# Altium PCB spine.PcbDoc
Units mil, origin at the board's own origin, x right, y up, seen from the top; angles counter-clockwise.
Board outline 2204.72 x 3346.82 mil, 2 copper layers (Top, Bottom); 70 components, 74 nets, 404 pads, 89 vias.
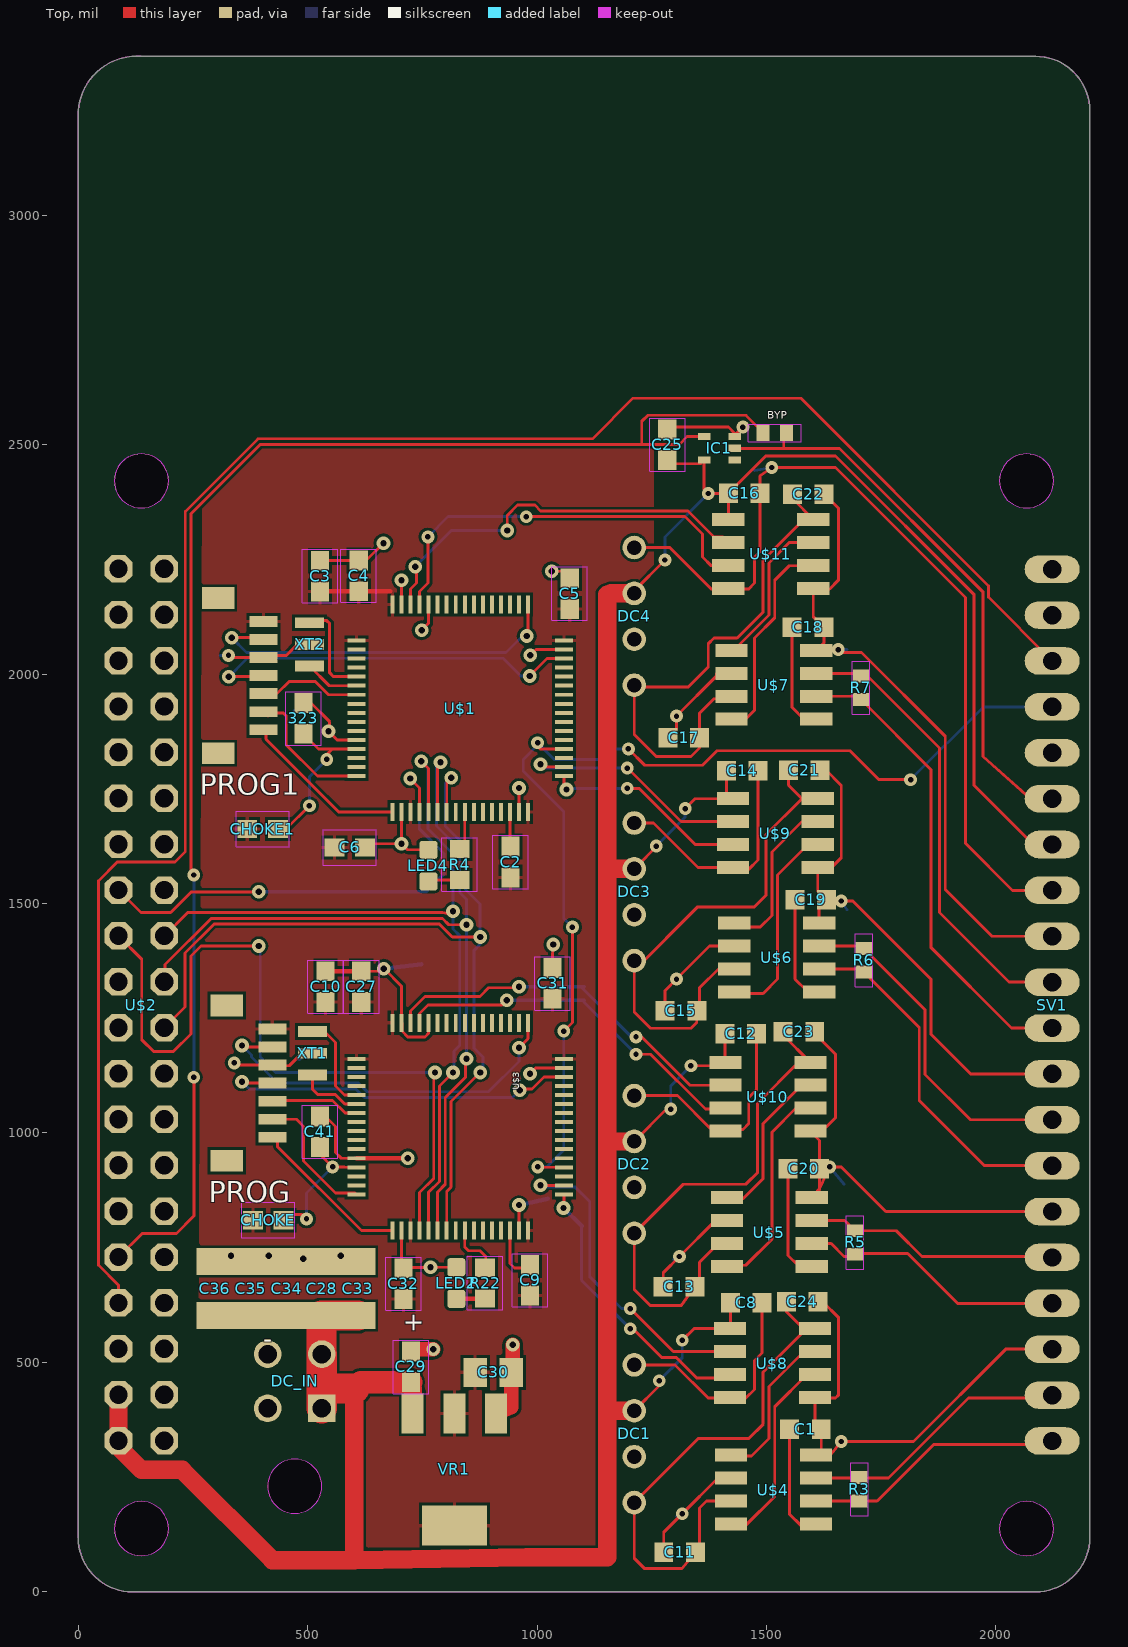
[diagram p0: Top view]
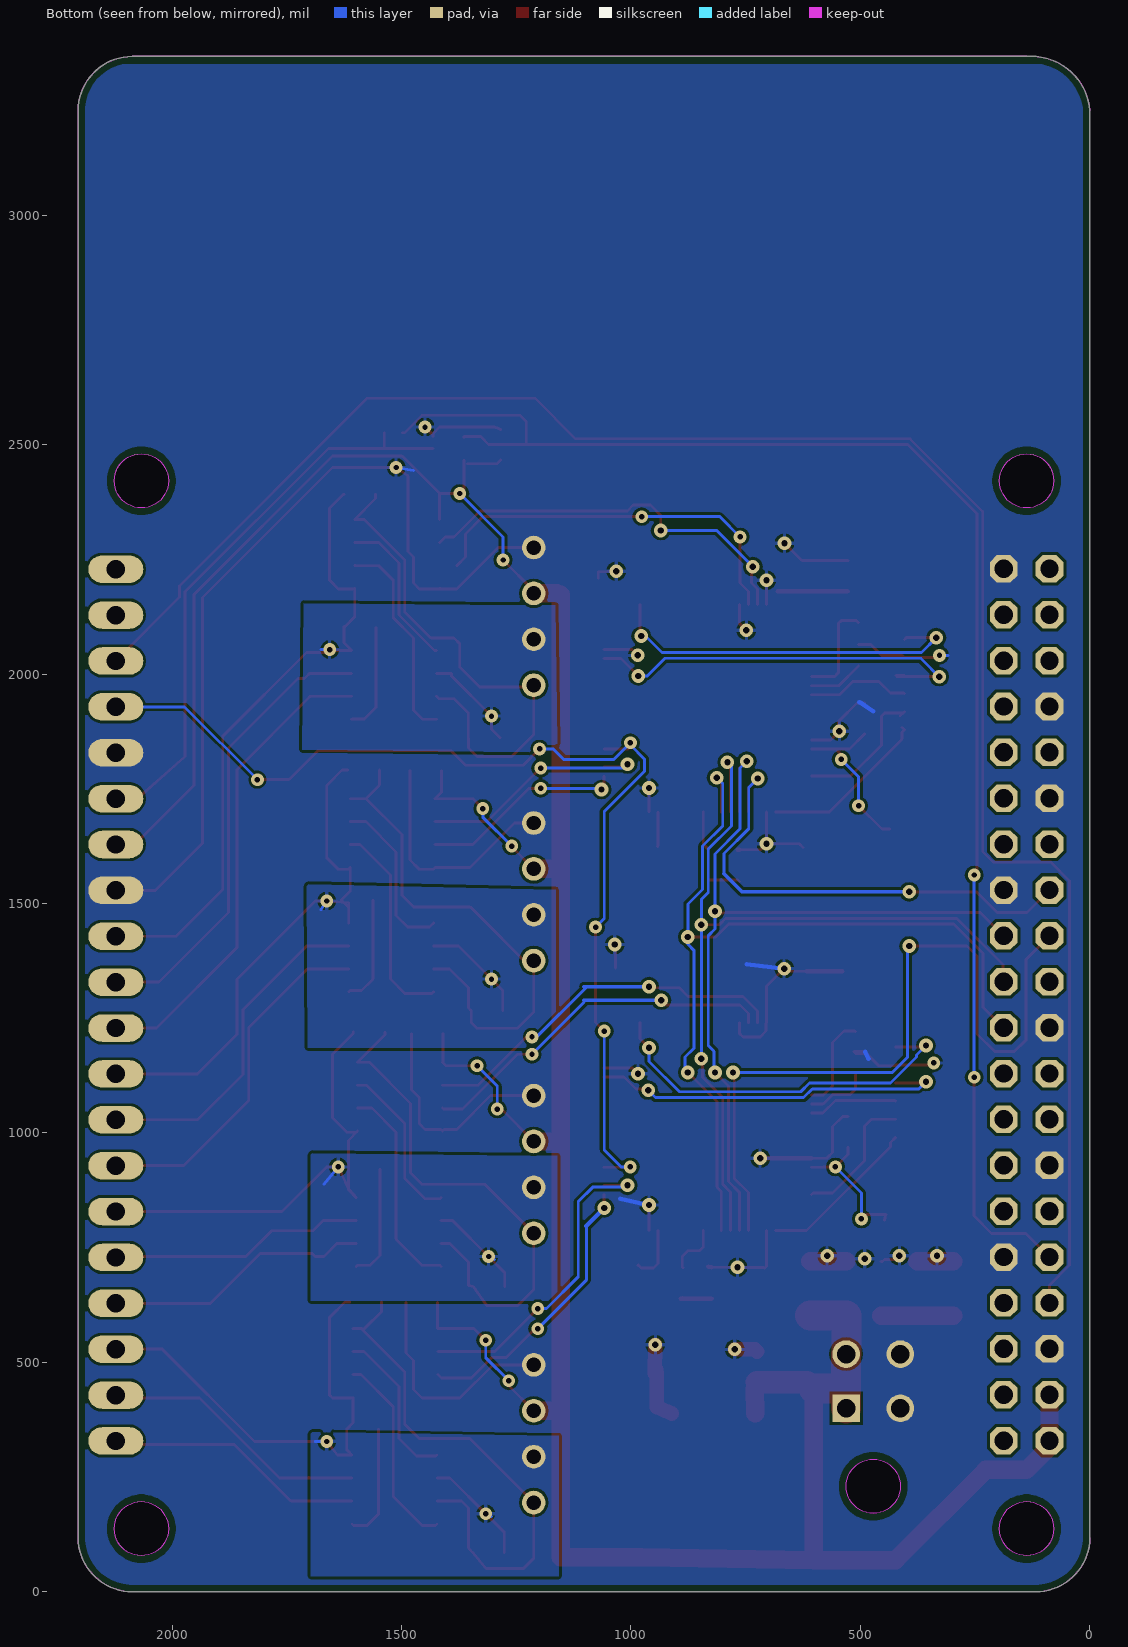
[diagram p1: Bottom view, seen from below]

## Layer stack, top to bottom
Top Solder: solder mask 0.4, Solder Resist, Dk 3.5
Top: signal copper 1.378
Dielectric 1: dielectric 12.6, FR-4, Dk 4.8
Bottom: signal copper 1.378
Bottom Solder: solder mask 0.4, Solder Resist, Dk 3.5

## Board outline
2204.72,3228.35 2204.72,118.11 cw(c2086.61,118.11) 2086.61,0 118.11,0 cw(c118.11,118.11) 0,118.11 0,3228.35 cw(c127.95,3218.51) 137.79,3346.46 2086.61,3346.46 cw(c2086.61,3228.35)
cut-out: 2066.92,2362.2 ccw(c2066.92,2421.26) 2125.97,2421.26 ccw(c2066.92,2421.26) 2066.92,2480.32 ccw(c2066.92,2421.26) 2007.87,2421.26 ccw(c2066.92,2421.26)
cut-out: 2066.92,78.75 ccw(c2066.92,137.8) 2125.97,137.8 ccw(c2066.92,137.8) 2066.92,196.85 ccw(c2066.92,137.8) 2007.87,137.8 ccw(c2066.92,137.8)
cut-out: 137.79,2362.2 ccw(c137.79,2421.26) 196.84,2421.26 ccw(c137.79,2421.26) 137.79,2480.32 ccw(c137.79,2421.26) 78.73,2421.26 ccw(c137.79,2421.26)
cut-out: 472.05,170.87 ccw(c472.05,229.92) 531.11,229.92 ccw(c472.05,229.92) 472.05,288.98 ccw(c472.05,229.92) 413,229.92 ccw(c472.05,229.92)
cut-out: 137.79,78.75 ccw(c137.79,137.8) 196.84,137.8 ccw(c137.79,137.8) 137.79,196.85 ccw(c137.79,137.8) 78.73,137.8 ccw(c137.79,137.8)

## Design rules (kind name [scope] priority, off if disabled: settings)
BoardOutlineClearance [All] p1: gap=15 ignorepadtopadclearanceinfootprint=FALSE
Clearance [All] p1: gap=6 ignorepadtopadclearanceinfootprint=FALSE except(0: Arc-Hole Track-Hole SMDPad-Hole THPad-Hole Via-Hole Fill-Hole Poly-Hole Region-Hole Text-Hole)
ComponentClearance [All] p1: gap=1 collisioncheckmode=3 verticalgap=1 showdistances=FALSE
DiffPairsRouting [All] p1: maxlimit=393.7 minlimit=6 mostfreqgap=8 toplayer_minwidth=6 toplayer_maxwidth=15 toplayer_prefwidth=8 bottomlayer_minwidth=6 bottomlayer_maxwidth=15 bottomlayer_prefwidth=8 maxuncoupledlength=500
HoleSize [All] p1: absolutevalues=TRUE maxlimit=265 minlimit=10 maxpercent=80.000 minpercent=20.000
HoleToHoleClearance [All] p1: gap=10 allowstackedmicrovias=FALSE
MinimumAnnularRing [All] p1: minimumring=5
MinimumSolderMaskSliver [All] p1: minsoldermaskwidth=0
PlaneClearance [All] p1: clearance=10
PlaneConnect [All] p1: planeconnectstyle=Direct reliefexpansion=16 reliefentries=4 reliefconductorwidth=6 reliefairgap=6
PolygonConnect [All] p1: connectstyle=Relief reliefconductorwidth=8 reliefentries=4 polygonreliefangle="90 Angle" airgapwidth=6
RoutingCorners [All] p1: cornerstyle=45-Degree minsetback=49.21 maxsetback=49.21
RoutingVias [All] p1: holewidth=15 width=30 viastyle="Through Hole" minholewidth=13 minwidth=27 maxholewidth=100 maxwidth=114
SilkToSilkClearance [All] p1: silktosilkclearance=0
SilkToSolderMaskClearance [IsPad] p1: minsilkscreentomaskgap=6 clearancetoexposedcopper=TRUE
SolderMaskExpansion [All] p1: expansion=2.95 istentingtop=FALSE
Width [All] p1: maxlimit=400 minlimit=6 preferedwidth=8
20 further rules are at their usual default settings.

## Classes and differential pairs
polygon class PolygonThermal_ON_Width98400_Gap100000: Polygon_1_Net_3V3
polygon class PolygonThermal_ON_Width100000_Gap100000: Polygon_1_Net_CAN1_GND Polygon_1_Net_CAN2_GND Polygon_1_Net_CAN3_GND
polygon class PolygonThermal_ON_Width160000_Gap100000: Polygon_1_Net_CAN4_GND Polygon_1_Net_GND
polygon class Isolate_9.84: Polygon_1_Net_3V3
polygon class Isolate_10: Polygon_1_Net_CAN1_GND Polygon_1_Net_CAN2_GND Polygon_1_Net_CAN3_GND Polygon_1_Net_CAN4_GND Polygon_1_Net_GND

## Components (designator, comment, footprint, x,y, rotation, side; value= is the part's Value field where it differs from the comment)
323 "1 uF" C0603 490.55,1903.54 r90 top (schematic designator C7)
BYP "" R0402 1518.11,2525.98 r180 top
C1 ".1 uF" C0603K 1585.04,354.33 r0 top
C2 "4.7" C0603 942.52,1590.55 r90 top
C3 "1uF" C0603 527.17,2213.78 r90 top
C4 "100nF" C0603 611.42,2214.17 r90 top
C5 "100nF" C0603 1071.26,2175.59 r90 top
C6 "100nF" C0603 591.73,1622.44 r0 top
C8 ".1 uF" C0603K 1455.91,630.32 r0 top
C9 "4.7" C0603 985.04,679.13 r90 top
C10 "1uF" C0603 538.98,1318.9 r90 top
C11 "1 uF" C0603K 1310.63,85.83 r180 top
C12 ".1 uF" C0603K 1444.09,1216.14 r0 top
C13 "1 uF" C0603K 1309.45,665.35 r180 top
C14 ".1 uF" C0603K 1447.24,1789.37 r0 top
C15 "1 uF" C0603K 1313.78,1266.54 r180 top
C16 ".1 uF" C0603K 1451.57,2394.09 r0 top
C17 "1 uF" C0603K 1320.08,1861.42 r180 top
C18 ".1 uF" C0603K 1590.55,2101.97 r0 top
C19 ".1 uF" C0603K 1596.85,1507.87 r0 top
C20 ".1 uF" C0603K 1581.5,921.65 r0 top
C21 ".1 uF" C0603K 1582.28,1790.94 r0 top
C22 ".1 uF" C0603K 1590.94,2392.13 r0 top
C23 ".1 uF" C0603K 1570.87,1220.47 r0 top
C24 ".1 uF" C0603K 1578.35,631.89 r0 top
C25 "100nF" C0603 1283.86,2500 r90 top
C27 "100nF" C0603 616.93,1318.9 r90 top
C28 "47 uF" C1206K 530.32,661.02 r90 top
C29 "100nF" C0603 725.2,490.16 r90 top
C30 "10uF" C0805K 904.33,478.35 r0 top
C31 "100nF" C0603 1033.86,1325.98 r90 top
C32 "100nF" C0603 708.66,671.65 r90 top
C33 "47 uF" C1206K 609.06,661.02 r90 top
C34 "47 uF" C1206K 454.72,661.02 r90 top
C35 "47 uF" C1206K 375.98,661.02 r90 top
C36 "47 uF" C1206K 297.24,661.02 r90 top
C41 "1 uF" C0603 526.77,1002.76 r90 top
CHOKE "600r" 0603 414.17,809.84 r0 top
CHOKE1 "600r" 0603 401.97,1662.2 r0 top
DC1 "VA-1224S" 4SIL 1211.81,344.49 r270 top
DC2 "VA-1224S" 4SIL 1211.81,931.5 r270 top
DC3 "VA-1224S" 4SIL 1211.81,1525.59 r270 top
DC4 "VA-1224S" 4SIL 1211.81,2125.98 r270 top
DC_IN "" 43045-0400 472.05,229.92 r0 top
IC1 "74AHC1G14DCK" SC70-5 1397.64,2492.13 r90 top
LED2 "G" LED-0603 824.02,672.83 r0 top
LED4 "G" LED-0603 763.39,1582.68 r0 top
PROG "22" BM07B-SRSS-TB 359.06,1108.66 r90 top
PROG1 "BM07B-SRSS-TB" BM07B-SRSS-TB 340.16,1996.85 r90 top
R3 "" R0402 1702.36,223.62 r90 top
R4 "70" R0603 831.5,1585.04 r90 top
R5 "" R0402 1693.31,761.42 r90 top
R6 "" R0402 1712.2,1376.38 r90 top
R7 "" R0402 1705.91,1970.47 r90 top
R22 "70" R0603 886.61,672.83 r90 top
SV1 "" MA20-1L 2122.83,1278.74 r90 top
U$1 "STM32F446RET6" TQFP64 832.68,1925.59 r270 top
U$2 "" UP_BOARD 2204.72,0 r90 top
U$3 "STM32F446RET6" TQFP64 832.68,1013.78 r270 top
U$4 "MCP2561" SO08 1515.35,222.83 r270 top
U$5 "MCP2561" SO08 1506.3,783.86 r270 top
U$6 "MCP2561" SO08 1522.44,1382.68 r270 top
U$7 "MCP2561" SO08 1516.14,1976.77 r270 top
U$8 "SI8410" SO08 1512.99,498.43 r270 top
U$9 "SI8410" SO08 1519.29,1653.54 r270 top
U$10 "SI8410" SO08 1503.15,1079.13 r270 top
U$11 "SI8410" SO08 1509.45,2262.2 r270 top
VR1 "LM1117" SOT-223 820.08,266.54 r180 top
XT1 "CSTCE" CSTCE 510.63,1173.62 r270 top
XT2 "CSTCE" CSTCE 504.33,2064.96 r270 top

## Footprints (in the part's own frame and the unit in brackets; to place one, negate y for a bottom-side part, rotate by r counter-clockwise, add the part's x,y. Pads: shape width x height; smd on the part's side, far side on the other; paste and mask are expansions set on the pad)
4SIL [mil] "4SIL"
  round 51.5 hole 31.5: 1(-150,0) 2(-50,0) 3(50,0) 4(150,0)
  body extent -176,-26 176,26, height 50
0603 [mm] "0603"
  rect 1.1x1 smd: 1(-0.85,0) 2(0.85,0)
  Top keep-out lines w0.051: -1.473,-0.983 -1.473,0.983 1.473,0.983 1.473,-0.983 -1.473,-0.983
  body extent -1.5,-1.01 1.5,1.01, height 3.81
43045-0400 [mil] "43045-0400"
  rect 60.24x60.24 / inner round 55.65 / far side rect 60.24x60.24 hole 40.16: P$1(59.06,170.08)
  round 60.24 hole 40.16: P$2(-59.06,170.08) P$3(59.06,288.19) P$4(-59.06,288.19)
  body extent -89,140 89,319, height 50
BM07B-SRSS-TB [mm] "BM07B-SRSS-TB"
  rect 0.6x1.55 smd: 1(3,-1.625) 2(2,-1.625) 3(1,-1.625) 4(0,-1.625) 5(-1,-1.625) 6(-2,-1.625) 7(-3,-1.625)
  rect 1.2x1.8 smd: FIT@1(4.3,0.9) FIT@2(-4.3,0.9)
  body extent -4.9,-2.4 4.9,1.8, height 3.81
C0603 [mm] "C0603"
  rect 1.1x1 smd: 1(-0.85,0) 2(0.85,0)
  Top keep-out lines w0.051: -1.473,0.983 -1.473,-0.983 1.473,-0.983 1.473,0.983 -1.473,0.983
  body extent -1.5,-1.01 1.5,1.01, height 3.81
C0603K [mm] "C0603K"
  rect 1.05x1.08 smd: 1(-0.875,0) 2(0.875,0)
  body extent -1.4,-0.54 1.4,0.54, height 3.81
C0805K [mm] "C0805K"
  rect 1.3x1.6 smd: 1(-1,0) 2(1,0)
  body extent -1.65,-0.8 1.65,0.8, height 3.81
C1206K [mm] "C1206K"
  rect 1.5x2 smd: 1(-1.5,0) 2(1.5,0)
  body extent -2.25,-1 2.25,1, height 3.81
CSTCE [mil] "CSTCE"
  rect 23.62x62.99 smd: 1(-47.24,0) 2(0,0) 3(47.24,0)
  body extent -59,-31 59,31, height 50
LED-0603 [mm] "LED-0603"
  rrect30% 1x1 smd: A(0,-0.877) C(0,0.877)
  body extent -0.51,-1.39 0.51,1.39, height 1.27
MA20-1L [mil] "MA20-1L"
  oval 60x120 hole 40: 1(950,0) 2(850,0) 3(750,0) 4(650,0) 5(550,0) 6(450,0) 7(350,0) 8(250,0) 9(150,0) 10(50,0) 11(-50,0) 12(-150,0) 13(-250,0) 14(-350,0) 15(-450,0) 16(-550,0) 17(-650,0) 18(-750,0) 19(-850,0) 20(-950,0)
  body extent -980,-60 980,60, height 150
R0402 [mm] "R0402"
  rect 0.7x0.9 smd: 1(-0.65,0) 2(0.65,0)
  Top keep-out lines w0.051: 1.473,0.483 1.473,-0.483 -1.473,-0.483 -1.473,0.483 1.473,0.483
  body extent -1.5,-0.51 1.5,0.51, height 3.81
R0603 [mm] "R0603"
  rect 1x1.1 smd: 1(-0.85,0) 2(0.85,0)
  Top keep-out lines w0.051: -1.473,0.983 -1.473,-0.983 1.473,-0.983 1.473,0.983 -1.473,0.983
  body extent -1.5,-1.01 1.5,1.01, height 3.81
SC70-5 [mm] "SC70-5"
  rect 0.4x0.7 smd: 1(-0.65,-0.85) 2(0,-0.85) 3(0.65,-0.85) 4(0.65,0.85) 5(-0.65,0.85)
  body extent -1.07,-1.2 1.07,1.2, height 3.81
SO08 [mm] "SO08"
  rect 0.72x1.78 smd: 1(-1.905,-2.35) 2(-0.635,-2.35) 3(0.635,-2.35) 4(1.905,-2.35) 5(1.905,2.35) 6(0.635,2.35) 7(-0.635,2.35) 8(-1.905,2.35)
  body extent -2.51,-3.24 2.51,3.24, height 3.81
SOT-223 [mil] "SOT-223"
  rect 47.99x87.99 smd: 1(-90.98,-122.01) 2(0,-122.01) 3(90.98,-122.01)
  rect 141.73x86.61 smd: 4(0,122.01)
  body extent -115,-166 115,165, height 150
TQFP64 [mm] "TQFP64"
  rect 0.22x1 smd: 1(-3.75,-5.75) 2(-3.25,-5.75) 3(-2.75,-5.75) 4(-2.25,-5.75) 5(-1.75,-5.75) 6(-1.25,-5.75) 7(-0.75,-5.75) 8(-0.25,-5.75) 9(0.25,-5.75) 10(0.75,-5.75) 11(1.25,-5.75) 12(1.75,-5.75) 13(2.25,-5.75) 14(2.75,-5.75) 15(3.25,-5.75) 16(3.75,-5.75) 33(3.75,5.75) 34(3.25,5.75) 35(2.75,5.75) 36(2.25,5.75) 37(1.75,5.75) 38(1.25,5.75) 39(0.75,5.75) 40(0.25,5.75) 41(-0.25,5.75) 42(-0.75,5.75) 43(-1.25,5.75) 44(-1.75,5.75) 45(-2.25,5.75) 46(-2.75,5.75) 47(-3.25,5.75) 48(-3.75,5.75)
  rect 1x0.22 smd: 17(5.75,-3.75) 18(5.75,-3.25) 19(5.75,-2.75) 20(5.75,-2.25) 21(5.75,-1.75) 22(5.75,-1.25) 23(5.75,-0.75) 24(5.75,-0.25) 25(5.75,0.25) 26(5.75,0.75) 27(5.75,1.25) 28(5.75,1.75) 29(5.75,2.25) 30(5.75,2.75) 31(5.75,3.25) 32(5.75,3.75) 49(-5.75,3.75) 50(-5.75,3.25) 51(-5.75,2.75) 52(-5.75,2.25) 53(-5.75,1.75) 54(-5.75,1.25) 55(-5.75,0.75) 56(-5.75,0.25) 57(-5.75,-0.25) 58(-5.75,-0.75) 59(-5.75,-1.25) 60(-5.75,-1.75) 61(-5.75,-2.25) 62(-5.75,-2.75) 63(-5.75,-3.25) 64(-5.75,-3.75)
  body extent -6.25,-6.25 6.25,6.25, height 3.81
UP_BOARD [mil] "UP_BOARD"
  oct 60x60 / inner round 55.43 / far side oct 60x60 hole 40: 1(329.53,2016.93) 2(329.53,2116.93) 3(429.53,2016.93) 4(429.53,2116.93) 5(529.53,2016.93) 6(529.53,2116.93) 7(629.53,2016.93) 8(629.53,2116.93) 9(729.53,2016.93) 10(729.53,2116.93) 11(829.53,2016.93) 12(829.53,2116.93) 13(929.53,2016.93) 14(929.53,2116.93) 15(1029.53,2016.93) 16(1029.53,2116.93) 17(1129.53,2016.93) 18(1129.53,2116.93) 19(1229.53,2016.93) 20(1229.53,2116.93) 21(1329.53,2016.93) 22(1329.53,2116.93) 23(1429.53,2016.93) 24(1429.53,2116.93) 25(1529.53,2016.93) 26(1529.53,2116.93) 27(1629.53,2016.93) 28(1629.53,2116.93) 29(1729.53,2016.93) 30(1729.53,2116.93) 31(1829.53,2016.93) 32(1829.53,2116.93) 33(1929.53,2016.93) 34(1929.53,2116.93) 35(2029.53,2016.93) 36(2029.53,2116.93) 37(2129.53,2016.93) 38(2129.53,2116.93) 39(2229.53,2016.93) 40(2229.53,2116.93)
  body extent 302,1989 2257,2145, height 150

## Part data
323 C2 C3 C4 C5 C6 C9 C10 C25 C27 C29 C31 C32 C41: library part C0603, PackageName=C0603
BYP R3 R5 R6 R7: library part R0402, PackageName=R0402
C1 C8 C11 C12 C13 C14 C15 C16 C17 C18 C19 C20 C21 C22 C23 C24: library part C0603K, PackageName=C0603K
C28 C33 C34 C35 C36: library part C1206K, PackageName=C1206K
C30: library part C0805K, PackageName=C0805K
CHOKE CHOKE1: library part 0603, PackageName=0603
DC1 DC2 DC3 DC4: library part 4SIL, PackageName=4SIL
DC_IN: library part 43045-0400, PackageName=43045-0400
IC1: library part SC70-5, PackageName=SC70-5
LED2 LED4: library part LED-0603, PackageName=LED-0603
PROG: library part BM07B-SRSS-TB, PackageName=BM07B-SRSS-TB
R4 R22: library part R0603, PackageName=R0603
SV1: library part MA20-1L, PackageName=MA20-1L
U$1 U$3: library part TQFP64, PackageName=TQFP64
U$2: library part UP_BOARD, PackageName=UP_BOARD
U$4 U$5 U$6 U$7 U$8 U$9 U$10 U$11: library part SO08, PackageName=SO08
VR1: library part SOT-223, PackageName=SOT-223
PROG1: PackageName=BM07B-SRSS-TB
XT1 XT2: PackageName=CSTCE

## Free pads (board coordinates)
  round 118.11 hole 118.11 unplated: MH1(137.79,137.8) MH1(472.05,229.92) MH2(137.79,2421.26) MH3(2066.92,2421.26) MH4(2066.92,137.8)

## Via types
v1: diameter 29.78/29.78 (per signal layer), hole 13.78, Top to Bottom, tented both sides, 49 vias
v2: diameter 27.81/27.81 (per signal layer), hole 11.81, Top to Bottom, tented both sides, 40 vias

## Nets (pads, with @x,y where several pads share a name; then routed paths per layer and width w, separated by ;. In a path a pad name is that pad's centre, name@x,y a point inside that pad or via, vN(x,y) a via of type N, cw(c..) or ccw(c..) an arc to the next point about the centre after c; other vN are vias at no path point)
3V3: C2.1 C3.1 C4.1 C5.1 C6.1 C9.1 C10.1 C27.1 C30.1 C31.1 C32.1 CHOKE1.1 CHOKE.1 PROG1.1 PROG.1 U$1.1 U$1.19 U$1.32 U$1.48 U$1.64 U$3.1 U$3.19 U$3.32 U$3.48 U$3.64 VR1.2 VR1.4 | length 222.1
  Top w9.84: C3.1 680.32,2180.32 C4.1
': C17.1 C22.1 DC4.4 U$7.3 U$11.8 | length 1150.9
  Top w6.3: U$7.3 1418.31,1946.46 1385.83,1946.46 1354.53,1915.16 C17.1 1354.33,1861.22 1354.33,1839.37 1335.43,1820.47 1259.84,1820.47 1211.81,1868.5 DC4.4 1216.14,1971.65 1329.13,1971.65 1373.23,2015.75 1373.23,2066.14 1385.83,2078.74 1436.22,2078.74 1492.91,2135.43 1492.91,2248.82 1581.3,2337.2 U$11.8 1556.5,2382.68 C22.1
CAN1_GND: C1.2 C11.2 C24.2 DC1.3 SV1.18 U$4.2 U$4.8 U$8.5 | length 1309.9
  Top w6.3: C11.2 1276.18,129.72 v2(1316.54,170.08) 1394.29,247.83 U$4.2 ; C24.2 1623.23,631.89 1656.69,598.43 1656.69,428.35 1650.39,422.05 1606.89,422.05 U$8.5 1605.51,368.31 C1.2 1619.49,309.45 U$4.8 1639.57,297.83 v2(1662.99,327.56) 1820.47,327.56 2021.65,528.74 SV1.18
  Bottom w6.3: 1303.94,163.78 v2(1316.54,170.08) ; v2(1662.99,327.56) 1688.19,327.56
CAN1_H: R3.2 SV1.19 U$4.7 | length 685.8
  Top w6.3: R3.2 1702.36,247.83 U$4.7 1765.94,247.83 1940.16,422.05 2116.14,422.05 SV1.19
CAN1_L: R3.1 SV1.20 U$4.6 | length 569.3
  Top w6.3: U$4.6 1702.36,197.83 R3.1 1741.34,198.03 1864.57,321.26 2115.35,321.26 SV1.20
CAN1_RX: U$3.33 U$8.3 | length 618.3
  Top w6.3: v1(1057.87,836.61) 1059.06,837.8 U$3.33 ; v2(1203.15,573.23) 1209.45,573.23 1272.44,510.24 1303.94,510.24 1348.03,466.14 1413.19,466.14 U$8.3
  Bottom w6.3: 1097.24,797.24 1097.24,679.13 v2(1203.15,573.23)
  Bottom w9.84: v1(1057.87,836.61) 1097.24,797.24
CAN1_TX: U$3.34 U$8.2 | length 710.6
  Top w6.3: v1(1007.48,885.83) U$3.34 ; v2(1203.15,617.32) 1297.05,523.43 U$8.2
  Bottom w6.3: v1(1007.48,885.83) 1011.42,881.89 1083.46,881.89 1114.96,850.39 1114.96,686.61 1184.25,617.32 v2(1203.15,617.32)
CAN2_GND: C13.2 C20.2 C23.2 DC2.3 SV1.15 U$5.2 U$5.8 U$10.5 | length 1319.4
  Top w6.3: C13.2 1275,695.47 v2(1310.24,730.71) 1388.39,808.86 U$5.2 ; C23.2 1605.32,1216.73 1650.39,1171.65 1650.39,1033.07 1618.9,1001.57 1598.23,1001.57 U$10.5 1615.94,983.86 1615.94,921.65 1615.94,875.98 U$5.8 1614.76,877.76 v2(1637.8,925.98) 1662.99,925.98 1760.24,828.74 SV1.15
  Bottom w6.3: 1297.64,724.41 1303.94,730.71 v2(1310.24,730.71) ; v2(1637.8,925.98) 1669.29,888.19
CAN2_H: R5.2 SV1.16 U$5.7 | length 557.2
  Top w6.3: U$5.7 1671.46,808.86 R5.2 1783.07,787.01 1839.37,730.71 2120.87,730.71 SV1.16
CAN2_L: R5.1 SV1.17 U$5.6 | length 583.1
  Top w6.3: U$5.6 1641.14,758.86 1669.29,730.71 1688.19,730.71 R5.1 1694.49,737.01 1807.87,737.01 1916.14,628.74 SV1.17
CAN2_RX: U$3.61 U$10.3 | length 800.7
  Top w6.3: U$3.61 744.09,1260.63 762.2,1278.74 923.23,1278.74 v1(933.86,1289.37) ; v2(1215.75,1171.65) 1247.24,1171.65 1366.93,1051.97 1408.46,1051.97 U$10.3
  Bottom w6.3: 1102.36,1289.37 1102.36,1285.04 v2(1215.75,1171.65)
  Bottom w7.87: v1(933.86,1289.37) 1102.36,1289.37
CAN2_TX: U$3.62 U$10.2 | length 835.4
  Top w6.3: U$3.62 724.41,1266.14 755.91,1297.64 875.59,1297.64 894.49,1316.54 958.27,1316.54 v1(960.63,1318.9) ; v2(1215.75,1209.45) 1228.35,1209.45 1333.66,1104.13 U$10.2
  Bottom w6.3: 1096.06,1318.9 1211.81,1203.15 v2(1215.75,1209.45)
  Bottom w7.87: v1(960.63,1318.9) 1096.06,1318.9 1102.36,1318.9
CAN3_GND: C15.2 C19.2 C21.2 DC3.3 SV1.12 U$6.2 U$6.8 U$9.5 | length 1461.2
  Top w6.3: C15.2 1279.33,1310.83 v2(1303.94,1335.43) 1376.18,1407.68 U$6.2 ; C21.2 1629.53,1790.94 1662.99,1757.48 1662.99,1600 1637.8,1574.8 1615.55,1574.8 U$9.5 1611.81,1527.36 C19.2 1614.96,1491.54 U$6.8 1615.16,1501.77 v2(1662.99,1505.51) 1688.19,1505.51 1858.27,1335.43 1858.27,1215.75 1945.28,1128.74 SV1.12
  Bottom w6.3: v2@1297.64,1329.13 v2(1303.94,1335.43) ; v2(1662.99,1505.51) 1675.59,1486.61
CAN3_H: R6.2 SV1.13 U$6.7 | length 747.4
  Top w6.3: U$6.7 1706.5,1407.68 R6.2 1845.67,1268.5 1845.67,1127.56 1944.49,1028.74 SV1.13
CAN3_L: R6.1 SV1.14 U$6.6 | length 778.7
  Top w6.3: U$6.6 1705.32,1357.68 R6.1 1833.07,1229.92 1833.07,1070.87 1975.2,928.74 SV1.14
CAN3_RX: U$1.33 U$9.3 | length 446.2
  Top w6.3: U$1.33 1059.06,1753.54 v1(1064.17,1748.43) ; v2(1196.85,1751.18) 1222.05,1751.18 1344.69,1628.54 U$9.3
  Bottom w6.3: v1(1064.17,1748.43) 1066.93,1751.18 v2(1196.85,1751.18)
CAN3_TX: U$1.34 U$9.2 | length 538
  Top w6.3: v1(1007.48,1803.94) 1001.18,1797.64 U$1.34 ; v2(1196.85,1795.28) 1313.58,1678.54 U$9.2
  Bottom w6.3: v1(1007.48,1803.94) 1016.14,1795.28 v2(1196.85,1795.28)
CAN4_GND: C17.2 C18.2 C22.2 DC4.3 SV1.9 U$7.2 U$7.8 U$11.5 | length 1625.9
  Top w6.3: C17.2@1285.04,1862.01 C17.2 1303.94,1879.72 v2(1303.94,1908.66) 1390.75,1995.47 1390.75,2001.77 U$7.2 ; C22.2 1626.77,2392.13 1656.69,2362.2 1656.69,2204.72 1637.8,2185.83 1603.35,2185.83 U$11.5 1601.97,2125 C18.2 1625,2103.74 1625.2,2103.94 1625.2,2068.31 U$7.8 1654.92,2051.77 v2(1656.69,2053.54) 1662.99,2047.24 1707.09,2047.24 1889.76,1864.57 1889.76,1530.71 1991.73,1428.74 SV1.9
  Bottom w6.3: v2(1656.69,2053.54) 1675.59,2053.54
CAN4_H: R7.2 SV1.10 U$7.7 | length 1003.3
  Top w6.3: U$7.7 1700.2,2001.77 R7.2 1711.42,1990.55 1725.98,1990.55 1877.17,1839.37 1877.17,1480.32 2028.74,1328.74 SV1.10
CAN4_L: R7.1 SV1.11 U$7.6 | length 1040.8
  Top w6.3: U$7.6 1699.02,1951.77 R7.1 1858.27,1792.52 1858.27,1404.72 2034.25,1228.74 SV1.11
CAN4_RX: U$1.61 U$11.3 | length 864.2
  Top w6.3: U$1.61 744.09,2180.32 762.2,2198.43 v2(762.2,2299.21) ; v2(976.38,2343.31) 1322.83,2343.31 1360.63,2305.51 1360.63,2255.12 1379.53,2236.22
  Bottom w6.3: v2(762.2,2299.21) 806.3,2343.31 v2(976.38,2343.31)
CAN4_TX: U$1.62 U$11.2 | length 880
  Top w6.3: U$1.62 724.41,2185.83 737.01,2198.43 737.01,2231.5 v1(734.25,2234.25) ; v1(935.04,2312.99) 935.04,2346.06 957.48,2368.5 995.28,2368.5 1007.87,2355.91 1329.13,2355.91 1385.83,2299.21 1404.92,2299.21 U$11.2
  Bottom w6.3: v1(734.25,2234.25) 812.99,2312.99 v1(935.04,2312.99)
CS1: U$2.24 U$3.20 | length 1704
  Top w6.3: U$2.24 138.58,1378.74 138.58,1203.15 163.78,1177.95 207.87,1177.95 245.67,1215.75 245.67,1385.83 267.32,1407.48 v1(393.7,1407.48) ; U$3.20 744.09,870.08 774.8,900.79 774.8,1129.13 v1(777.56,1131.89)
  Bottom w6.3: v1(393.7,1407.48) 396.85,1404.33 396.85,1165.35 430.32,1131.89 v1(777.56,1131.89)
CS2: U$1.20 U$2.26 | length 1087.7
  Top w6.3: U$2.26 137.01,1480.32 201.57,1480.32 246.85,1525.59 v1(393.7,1525.59) ; v1(723.62,1772.44) 744.09,1751.97 U$1.20
  Bottom w6.3: v1(723.62,1772.44) 743.31,1752.76 743.31,1662.99 797.24,1609.06 797.24,1564.96
  Bottom w7.87: v1(393.7,1525.59) 757.87,1525.59 797.24,1564.96
  Bottom w9.84: U$2.26@87.8,1526.38 U$2.26
ESTOP: SV1.4 U$1.36 U$3.36 | length 2400.3
  Top w6.3: v2(1001.57,925.98) 1002.36,925.2 U$3.36 ; 1006.69,1837.01 U$1.36 ; v2(1058.27,1222.05) 1077.17,1240.94 v2(1077.17,1448.82) ; v2(1199.21,1837.01) 1234.65,1801.57 1360.63,1801.57 1392.13,1833.07 1681.89,1833.07 1744.88,1770.08 v2(1814.17,1770.08)
  Bottom w6.3: v2(1001.57,925.98) 1021.25,925.98 1058.27,962.99 v2(1058.27,1222.05) ; v2(1077.17,1448.82) 1058.27,1467.72 1058.27,1700.79 970.08,1788.98 970.08,1814.17 1001.18,1845.28 v2(1001.18,1850.39) 1037.4,1814.17 1146.46,1814.17 1169.29,1837.01 v2(1199.21,1837.01) ; v2(1814.17,1770.08) 1972.83,1928.74 SV1.4
GND: 323.2 C3.2 C4.2 C5.2 C6.2 C8.2 C10.2 C12.2 C14.2 C16.2 C25.2 C27.2 C28.2 C29.2 C30.2 C31.2 C32.2 C33.2 C34.2 C35.2 C36.2 C41.2 DC1.1 DC2.1 DC3.1 DC4.1 DC_IN.P$2 DC_IN.P$4 IC1.3 LED2.C LED4.C PROG1.3 PROG.3 SV1.5 SV1.8 U$1.12 U$1.18 U$1.31 U$1.47 U$1.60 U$1.63 U$2.6 U$2.9 U$2.14 U$2.20 U$2.25 U$2.30 U$2.34 U$2.39 U$3.12 U$3.18 U$3.31 U$3.47 U$3.60 U$3.63 U$8.4 U$9.4 U$10.4 U$11.4 VR1.1 XT1.2 XT2.2 | length 6664.6
  Top w6.3: v2(327.56,2040.94) 332.28,2036.22 PROG1.3 408.86,2040.94 453.54,2040.94 477.56,2064.96 XT2.2 ; v1(333.07,732.28) 363.78,732.28 C35.2 ; v2(340.16,1152.76) 344.88,1148.03 PROG.3 424.61,1146.46 459.84,1146.46 487.01,1173.62 XT1.2 514.17,1177.17 XT1.2@489.76,1177.17 ; v1(414.96,732.28) 422.83,724.41 447.24,724.41 451.57,720.08 C34.2 ; 323.2 507.09,1937.01 548.03,1896.06 548.03,1877.95 v1(545.67,1875.59) 564.57,1856.69 U$1.12 ; C41.2 538.58,1036.22 560.63,1014.17 560.63,957.48 573.23,944.88 U$3.12 ; C3.2 527.56,2247.64 C4.2 627.56,2247.64 v1(665.35,2285.43) ; v1(572.44,732.28) 584.65,720.08 C33.2 ; C27.2 660.24,1352.36 v1(666.14,1358.27) 704.72,1319.69 U$3.63 705.51,1239.37 705.51,1222.05 718.11,1209.45 755.91,1209.45 763.78,1217.32 U$3.60 ; C6.2 633.07,1630.32 v1(704.72,1630.32) ; U$3.18 704.72,709.06 C32.2 710.63,707.09 v1(767.72,707.09) 767.99,707.36 LED2.C ; U$1.18 v1(704.72,1630.32) ; U$1.63 v1(704.72,2204.72) ; v1(748.43,2095.67) 763.78,2111.02 U$1.60 ; LED4.C 717.83,1617.2 v1(704.72,1630.32) ; U$3.31 v1(960.63,842.91) ; U$1.31 v1(960.63,1751.97) ; v1(984.65,1129.13) 997.24,1141.73 U$3.47 ; v1(985.04,2040.94) 997.64,2053.54 U$1.47 ; v1(1031.89,2224.41) 1071.26,2222.83 C5.2@1071.26,2209.06 ; C31.2 1033.86,1387.01 v1(1035.43,1410.63) ; DC1.1 1300.79,494.49 1373.23,422.05 1419.09,422.05 U$8.4 1421.85,422.05 1455.12,422.05 1474.02,440.94 1474.02,503.94 1490.35,520.28 C8.2 ; DC2.1 1305.91,1081.5 1379.53,1007.87 1406.89,1007.87 U$10.4 1414.37,1007.87 1448.82,1007.87 1461.42,1020.47 1461.42,1077.17 1478.54,1094.29 C12.2 ; DC3.1 1253.54,1675.59 1350.59,1578.54 U$9.4 1430.51,1574.8 1461.42,1574.8 1481.69,1595.08 C14.2 ; DC4.1 1289.37,2275.98 1379.53,2185.83 1415.55,2185.83 U$11.4 1418.31,2185.83 1461.42,2185.83 1474.02,2198.43 1474.02,2255.12 1486.02,2267.13 C16.2 1486.02,2432.09 v2(1511.81,2450.39) 1650.39,2450.39 1933.86,2166.93 1933.86,1631.5 2036.61,1528.74 SV1.8 ; C25.2 1296.85,2538.58 1417.32,2538.58 1431.1,2524.8 IC1.3 1431.1,2520.87 v2(1448.82,2538.58)
  Top w9.84: C10.2 C27.2 ; U$3.12 v1(718.5,944.88) ; LED4.C LED4.C@767.05,1617.2 ; LED2.C LED2.C@831.61,708.66
  Top w32: C29.2 729.53,527.95 v1(773.62,528.35) ; VR1.1@911.06,388.54 943.7,402.28 C30.2 944.88,479.53 944.88,485.04 948.03,475.59 v1(946.85,538.58)
  Top w40: C36.2 C35.2 ; C28.2 C33.2
  Bottom w6.3: 308.66,2040.94 v2(327.56,2040.94) ; v2@333.86,1159.06 v2(340.16,1152.76) ; v2@1442.52,2544.88 v2(1448.82,2538.58) ; 1474.02,2444.09 v2(1511.81,2450.39)
  Bottom w9.84: 472.44,1919.29 501.97,1938.98 ; 482.28,1161.42 489.76,1177.17 ; v1(666.14,1358.27) 748.03,1368.11 ; v1(718.5,944.88) v1@728.35,944.88 ; v1(960.63,842.91) 1023.62,856.3
  other v1: 490.55,725.98
INDICATOR1: R22.2 U$3.25 | length 115.4
  Top w6.3: U$3.25 842.52,751.18 850.39,743.31 875.59,743.31 888.19,730.71 888.19,707.87 R22.2
INDICATOR2: R4.2 U$1.25 | length 85.3
  Top w6.3: R4.2 842.52,1629.53 U$1.25
L_5V: C8.1 C12.1 C14.1 C16.1 C25.1 C28.1 C29.1 C33.1 C34.1 C35.1 C36.1 DC1.2 DC2.2 DC3.2 DC4.2 DC_IN.P$1 DC_IN.P$3 IC1.5 SV1.7 U$2.2 U$2.4 U$8.1 U$9.1 U$10.1 U$11.1 VR1.3 | length 7907.9
  Top w6.3: C28.1 569.68,601.97 C33.1@585.83,585.83 ; DC1.2 1266.14,448.82 v2(1266.14,459.84) ; DC3.2 1266.14,1629.92 v2(1259.84,1625.2) ; DC4.2 1211.81,2181.89 v2(1278.74,2248.82) ; DC2.2@1214.57,981.5 DC2.2 1282.28,1051.97 v2(1291.34,1051.97) ; C25.1 1291.73,2458.66 1356.3,2458.66 ; v2(1316.54,548.03) 1341.93,573.43 U$8.1 1421.46,574.41 C8.1 ; v2(1322.83,1707.09) 1344.29,1728.54 U$9.1 1412.8,1742.52 C14.1 ; v2(1335.43,1146.46) 1402.95,1146.46 U$10.1 1409.65,1155.12 C12.1 ; IC1.5 1364.17,2402.76 v2(1373.23,2393.7) 1416.73,2393.7 C16.1 ; U$11.1 1417.13,2337.4 C16.1 ; SV1.7 2081.5,1628.74 1952.76,1757.48 1952.76,2173.23 1650.39,2475.59 1498.62,2475.59 C16.1
  Top w16: C29.1 734.25,432.2 VR1.3@729.09,388.54
  Top w40: U$2.2 U$2.4 87.8,315.75 137.8,265.75 226.38,265.75 423.23,68.9 601.97,68.9 ; C36.1 C35.1 C34.1 ; 601.97,442.91 601.97,68.9 ; VR1.3@729.09,388.54 C29.1@729.84,442.91 ; 1152.76,2173.23 1152.76,2166.93 ; DC1.2 1161.42,394.49 1152.76,403.15 ; DC2.2 1153.94,981.5 1152.76,982.68 ; DC3.2 1164.57,1575.59 1152.76,1587.4 ; DC4.2 1161.81,2175.98 1152.76,2166.93 ; 601.97,68.9 977.95,75.2 1152.76,75.2 1152.76,403.15 ; 1152.76,403.15 1152.76,982.68 ; 1152.76,982.68 1152.76,1587.4 ; 1152.76,1587.4 1152.76,2166.93
  Top w50: 601.97,442.91 615.75,456.69 C29.1
  Top w66: DC_IN.P$1 531.1,434.65 ; 601.97,442.91 539.37,442.91 531.1,434.65 ; C33.1 C28.1 530.32,518.9 DC_IN.P$3 531.1,434.65
  Bottom w6.3: v2(1259.84,1625.2) 1322.83,1688.19 v2(1322.83,1707.09) ; v2(1266.14,459.84) 1316.54,510.24 v2(1316.54,548.03) ; v2(1278.74,2248.82) 1278.74,2299.21 v2(1373.23,2393.7) ; v2(1291.34,1051.97) 1291.34,1102.36 v2(1335.43,1146.46)
MC01: U$3.5 XT1.1 | length 209.2
  Top w6.3: XT1.1 511.81,1222.05 535.43,1222.05 560.63,1196.85 560.63,1102.36 580.32,1082.68 U$3.5
MC02: U$1.5 XT2.1 | length 217.1
  Top w6.3: XT2.1 508.66,2116.54 541.73,2116.54 548.03,2110.24 548.03,2003.15 556.69,1994.49 U$1.5
MISO: U$1.22 U$2.21 U$3.22 | length 1932.1
  Top w6.3: U$2.21 188.98,1330.71 188.98,1366.93 289.76,1467.72 793.7,1467.72 807.48,1453.94 v1(846.46,1453.94) ; U$3.22 783.46,871.65 800,888.19 800,1077.17 844.09,1121.26 844.09,1159.06 v1(846.46,1161.42) ; U$1.22 783.46,1801.97 v1(789.76,1808.27)
  Bottom w6.3: v1(789.76,1808.27) 781.1,1799.61 781.1,1669.29 831.5,1618.9 831.5,1524.41 846.46,1509.45 v1(846.46,1453.94) v1(846.46,1161.42)
MOSI: U$1.23 U$2.19 U$3.23 | length 2010.9
  Top w6.3: U$2.19 233.07,1274.8 233.07,1392.13 296.06,1455.12 787.4,1455.12 815.35,1427.17 v1(875.98,1427.17) ; U$3.23 803.15,872.44 812.6,881.89 812.6,1068.5 v1(875.98,1131.89) ; U$1.23 803.15,1764.57 v1(812.99,1774.41)
  Bottom w6.3: v1(812.99,1774.41) 800,1761.42 800,1669.29 844.09,1625.2 844.09,1530.71 875.98,1498.82 v1(875.98,1427.17) 875.98,1411.42 862.99,1398.43 862.99,1184.25 881.89,1165.35 881.89,1137.8 v1(875.98,1131.89)
N$1: U$1.14
N$2: C41.1 CHOKE.2 U$3.13 | length 313.8
  Top w6.3: CHOKE.2 444.49,822.44 487.8,822.44 v2(497.64,812.6) ; C41.1 526.77,953.54 v2(554.33,925.98) 580.32,925.98 U$3.13
  Bottom w6.3: v2(497.64,812.6) 497.64,869.29 v2(554.33,925.98)
N$3: C9.2 U$3.30 | length 122.9
  Top w6.3: U$3.30@940.94,787.4 940.94,715.75 951.18,705.51 977.95,705.51 C9.2
N$4: 323.1 CHOKE1.2 U$1.13 | length 363.7
  Top w6.3: CHOKE1.2 452.76,1662.2 v2(503.94,1713.39) ; 323.1 523.62,1837.01 554.33,1837.01 ; v2(541.73,1814.17) 541.73,1824.41 554.33,1837.01 ; U$1.13 554.33,1837.01
  Bottom w6.3: v2(503.94,1713.39) 503.94,1776.38 v2(541.73,1814.17)
N$5: C2.2 U$1.30 | length 75.8
  Top w6.3: U$1.30@940.94,1699.21 940.94,1625.59 C2.2
N$6: C1.1 U$4.5 | length 253.8
  Top w6.3: C1.1 1550.59,169.09 1574.8,144.88 1604.92,144.88 U$4.5
N$7: LED4.A R4.1 | length 69.5
  Top w6.3: LED4.A 766.81,1551.57 R4.1
N$8: U$1.6 XT2.3 | length 119.8
  Top w6.3: XT2.3 547.24,1974.8 U$1.6
N$10: C20.1 U$5.5 | length 250.3
  Top w6.3: C20.1 1547.05,733.27 1568.5,711.81 1595.87,711.81 U$5.5
N$11: C15.1 C21.1 DC3.4 U$6.3 U$9.8 | length 1145.9
  Top w6.3: DC3.4 DC3.4@1211.81,1354.33 ; U$6.3 1395.47,1357.68 1354.33,1316.54 1354.33,1272.64 C15.1 1348.03,1266.34 1348.03,1240.94 1335.43,1228.35 1247.24,1228.35 1211.81,1263.78 DC3.4@1211.81,1354.33 ; C21.1 1547.83,1758.07 U$9.8@1577.36,1728.54 ; U$9.8 U$9.8@1577.36,1728.54 ; DC3.4@1211.81,1354.33 1350.39,1492.91 1474.02,1492.91 1499.21,1518.11 1499.21,1650.39 U$9.8@1577.36,1728.54
N$12: C11.1 C24.1 DC1.4 U$4.3 U$8.8 | length 1171.8
  Top w6.3: U$4.3 1369.49,197.83 1354.33,182.68 1354.33,95.08 C11.1 1315.94,50.39 1234.65,50.39 1211.81,73.23 DC1.4 1351.18,333.86 1461.42,333.86 1492.91,365.35 1492.91,478.74 1587.6,573.43 U$8.8 1605.32,573.23 1581.1,573.23 1543.9,610.43 C24.1
N$14: U$4.1 U$8.7 | length 344
  Top w6.3: U$4.1 1424.61,296.06 1467.72,296.06 1505.51,333.86 1505.51,447.24 1581.69,523.43 U$8.7
N$15: U$7.1 U$11.7 | length 342.3
  Top w6.3: U$7.1 1428.15,2051.77 1505.51,2129.13 1505.51,2242.52 1549.61,2286.61 1601.38,2286.61 U$11.7
N$16: U$4.4 U$8.6 | length 434.4
  Top w6.3: U$4.4 1425.79,144.88 1455.12,144.88 1518.11,207.87 1518.11,403.15 1588.39,473.43 U$8.6
N$17: U$7.4 U$11.6 | length 457.5
  Top w6.3: U$7.4 1454.53,1901.77 1474.02,1921.26 1474.02,2078.74 1518.11,2122.83 1518.11,2204.72 1549.61,2236.22 1600.98,2236.22 U$11.6
N$18: C18.1 U$7.5 | length 237.8
  Top w6.3: C18.1 1556.1,1927.36 1581.1,1902.36 1608.07,1902.36 U$7.5
N$19: C13.1 C23.1 DC2.4 U$5.3 U$10.8 | length 1146.2
  Top w6.3: U$5.3 1395.08,758.86 1354.33,718.11 1354.33,667.52 C13.1 1314.76,623.62 1247.24,623.62 1211.81,659.06 DC2.4 1318.5,888.19 1455.12,888.19 1480.32,913.39 1480.32,1064.57 1569.88,1154.13 U$10.8 1536.42,1213.39 C23.1
N$20: U$5.1 U$10.7 | length 355.4
  Top w6.3: U$5.1 1415.94,856.69 1448.82,856.69 1492.91,900.79 1492.91,1020.47 1576.57,1104.13 U$10.7
N$21: U$5.4 U$10.6 | length 461.4
  Top w6.3: U$5.4 1416.73,711.81 1455.12,711.81 1511.81,768.5 1511.81,1001.57 1564.37,1054.13 U$10.6
N$22: C19.1 U$6.5 | length 236.6
  Top w6.3: C19.1 1562.4,1335.24 1587.4,1310.24 1612.4,1310.24 U$6.5
N$24: U$3.14
N$26: U$6.1 U$9.7 | length 361.9
  Top w6.3: U$6.1 1438.78,1448.82 1486.61,1448.82 1511.81,1474.02 1511.81,1612.6 1577.76,1678.54 U$9.7
N$27: U$6.4 U$9.6 | length 450.7
  Top w6.3: U$6.4 1433.66,1303.94 1492.91,1303.94 1524.41,1335.43 1524.41,1562.2 1590.75,1628.54 U$9.6
N$28: LED2.A R22.1 | length 73.2
  Top w9.84: LED2.A 891.85,638.31 R22.1
N$30: U$3.6 XT1.3 | length 140.2
  Top w6.3: XT1.3 510.24,1125.98 510.24,1096.06 522.83,1083.46 560.63,1083.46 581.1,1062.99 U$3.6
NRST1: PROG.5 U$3.7 | length 195.3
  Top w6.3: PROG.5 424.61,1070.87 554.33,1070.87 581.89,1043.31 U$3.7
NRST2: PROG1.5 U$1.7 | length 225.3
  Top w6.3: PROG1.5 405.71,1959.06 434.65,1959.06 459.84,1984.25 516.54,1984.25 545.67,1955.12 U$1.7
SBUS_IN: BYP.1 IC1.2 SV1.6 | length 1249
  Top w6: 1537.01,2492.13 1537.8,2492.91 BYP.1@1537.8,2525.98
  Top w6.3: IC1.2 1537.01,2492.13 1659.06,2492.13 1971.65,2179.53 1971.65,1820.47 2075.98,1728.74 SV1.6
SCK: U$1.21 U$2.23 U$3.21 | length 1856.1
  Top w6.3: U$2.23 238.58,1480.32 793.7,1480.32 809.45,1477.17 v1(816.93,1483.46) ; v1(747.64,1810.24) 763.78,1794.09 U$1.21 ; U$3.21 763.78,870.87 787.4,894.49 787.4,1102.36 v1(816.93,1131.89)
  Bottom w6.3: v1(747.64,1810.24) 762.2,1795.67 762.2,1662.99 816.93,1608.27 v1(816.93,1483.46) 816.93,1444.49 831.5,1429.92 831.5,1190.55 818.9,1177.95 818.9,1133.86 v1(816.93,1131.89)
SWO1: U$3.55
SWO2: U$1.55
TCK1: PROG.2 U$3.49 | length 834.9
  Top w6.3: v1(357.09,1190.55) 360.24,1187.4 PROG.2 ; v1(960.63,1185.83) 980.32,1205.51 U$3.49
  Bottom w6.3: v1(357.09,1190.55) 377.95,1169.69 377.95,1165.35 434.65,1108.66 611.02,1108.66 629.92,1089.76 894.49,1089.76 960.63,1155.91 v1(960.63,1185.83)
TCK2: PROG1.2 U$1.49 | length 812.3
  Top w6.3: v1(334.65,2079.53) 400.2,2079.53 PROG1.2 ; v1(977.56,2083.07) 980.32,2085.83 U$1.49
  Bottom w6.3: v1(334.65,2079.53) 366.93,2047.24 932.28,2047.24 968.11,2083.07 v1(977.56,2083.07)
TMS1: PROG.4 U$3.46 | length 802.2
  Top w6.3: v1(357.09,1111.81) 360.24,1108.66 PROG.4 ; v1(962.6,1093.31) 965.35,1096.06 988.98,1096.06 1014.96,1122.05 U$3.46
  Bottom w6.3: v1(357.09,1111.81) 372.83,1096.06 604.72,1096.06 623.62,1077.17 946.46,1077.17 v1(962.6,1093.31)
TMS2: PROG1.4 U$1.46 | length 891.6
  Top w6.3: v1(328.35,1994.49) 419.69,1994.49 422.05,1996.85 PROG1.4 ; v1(983.86,1996.06) 1021.65,2033.86 U$1.46
  Bottom w6.3: v1(328.35,1994.49) 363.78,2029.92 367.72,2033.86 368.5,2034.65 925.98,2034.65 964.57,1996.06 v1(983.86,1996.06)
USART1_RX: PROG.7 U$3.17 | length 351.3
  Top w6.3: PROG.7 434.65,978.94 434.65,970.08 617.32,787.4 U$3.17
USART1_TX: PROG.6 U$3.16 | length 295.4
  Top w6.3: PROG.6 475.59,1029.92 491.34,1014.17 491.34,938.58 560.63,869.29 603.15,869.29 U$3.16
USART2_RX: PROG1.7 U$1.17 | length 370.8
  Top w6.3: PROG1.7@408.86,1883.46 PROG1.7 409.45,1873.43 409.45,1858.27 568.5,1699.21 U$1.17
USART2_TX: PROG1.6 U$1.16 | length 310.5
  Top w6.3: PROG1.6@413.58,1908.66 PROG1.6 407.28,1914.96 447.24,1914.96 453.54,1908.66 453.54,1845.67 521.26,1777.95 U$1.16
XBEE_RX: SV1.3 U$2.8 | length 4138.9
  Top w6: U$2.8 87.8,668.1 44.09,711.81 44.09,1549.61 85.02,1590.53 211.01,1590.53 233.52,1613.04 233.52,2354.64 391.82,2512.94 1120.81,2512.94 1209.45,2601.57 1574.8,2601.57 1983.8,2192.57 1983.8,2167.77 SV1.3
XBEE_TX: BYP.2 IC1.4 U$2.10 | length 3265.9
  Top w6: 1228.34,2500.79 1228.34,2551.18 1241.29,2564.12 1455.68,2564.12 1493.81,2525.98 BYP.2@1498.43,2525.98
  Top w6.3: U$2.10 139.37,781.1 214.17,781.1 251.97,818.9 v2(251.97,1121.26) ; v2(251.97,1562.2) 245.67,1568.5 245.67,2349.61 396.85,2500.79 1228.34,2500.79 1310.24,2500.79 1327.17,2517.72 IC1.4 IC1.4@1364.17,2516.14
  Bottom w6.3: v2(251.97,1121.26) v2(251.97,1562.2)
pads on no net: IC1.1 PROG1.FIT@1 PROG1.FIT@2 PROG.FIT@1 PROG.FIT@2 SV1.1 SV1.2 U$1.2 U$1.3 U$1.4 U$1.8 U$1.9 U$1.10 U$1.11 U$1.15 U$1.24 U$1.26 U$1.27 U$1.28 U$1.29 U$1.35 U$1.37 U$1.38 U$1.39 U$1.40 U$1.41 U$1.42 U$1.43 U$1.44 U$1.45 U$1.50 U$1.51 U$1.52 U$1.53 U$1.54 U$1.56 U$1.57 U$1.58 U$1.59 U$2.1 U$2.3 U$2.5 U$2.7 U$2.11 U$2.12 U$2.13 U$2.15 U$2.16 U$2.17 U$2.18 U$2.22 U$2.27 U$2.28 U$2.29 U$2.31 U$2.32 U$2.33 U$2.35 U$2.36 U$2.37 U$2.38 U$2.40 U$3.2 U$3.3 U$3.4 U$3.8 U$3.9 U$3.10 U$3.11 U$3.15 U$3.24 U$3.26 U$3.27 U$3.28 U$3.29 U$3.35 U$3.37 U$3.38 U$3.39 U$3.40 U$3.41 U$3.42 U$3.43 U$3.44 U$3.45 U$3.50 U$3.51 U$3.52 U$3.53 U$3.54 U$3.56 U$3.57 U$3.58 U$3.59

## Polygon pours and split planes (outlines as drawn)
GND on Bottom "Polygon_1_Net_GND" (solid, remove dead copper, pour order 5): -8,3328.87 2212.72,3328.87 2212.72,-8 -8,-8
CAN4_GND on Bottom "Polygon_1_Net_CAN4_GND" (solid, remove dead copper, pour order 2): 1164.53,2150.07 1713.44,2154.52 1716.34,1835.4 1160.81,1828.91
CAN3_GND on Bottom "Polygon_1_Net_CAN3_GND" (solid, remove dead copper, pour order 3): 1163.9,1530.49 1706.21,1541.72 1704.18,1185.94 1163.9,1185.94
CAN2_GND on Bottom "Polygon_1_Net_CAN2_GND" (solid, remove dead copper, pour order 1): 1161.14,949.82 1697.91,955.85 1697.91,634.76 1161.14,634.76
CAN1_GND on Bottom "Polygon_1_Net_CAN1_GND" (solid, remove dead copper, pour order 0): 1157.6,339.57 1697.91,347.99 1697.91,34.37 1157.6,34.37
3V3 on Top "Polygon_1_Net_3V3" (solid, remove dead copper, pour order 4): 270.69,2514.76 1254.92,2514.76 1254.92,44.29 260.81,44.29

## Keep-outs
Keep-Out Layer:
  the board outline again, w0

## Silkscreen, mask and mechanical layers (free items; w line width, h text height)
Top Overlay:
  text "+" at 748.8,563.79 h40.15 r90
  text "-" at 403.54,531.5 h40.15
Unrouted:
  lines w0: 454.72,601.97 530.32,601.97 ; 1001.18,1845.28 1006.69,1837.01 ; 1001.97,925.2 1020.47,925.2 ; 1356.3,2458.66 1364.17,2466.54 ; 1379.53,2236.22 1416.93,2237.2

## Text inside footprints (layer, text, board x,y; h text height)
SV1: tPlace "10" at 2237.83,1293.74 h77.5 r90; tPlace "20" at 2237.83,288.74 h77.5 r90; tPlace "1" at 2237.83,2213.74 h77.5 r90